# EAGLE board Board_v0 (EAGLE 9.6.2)
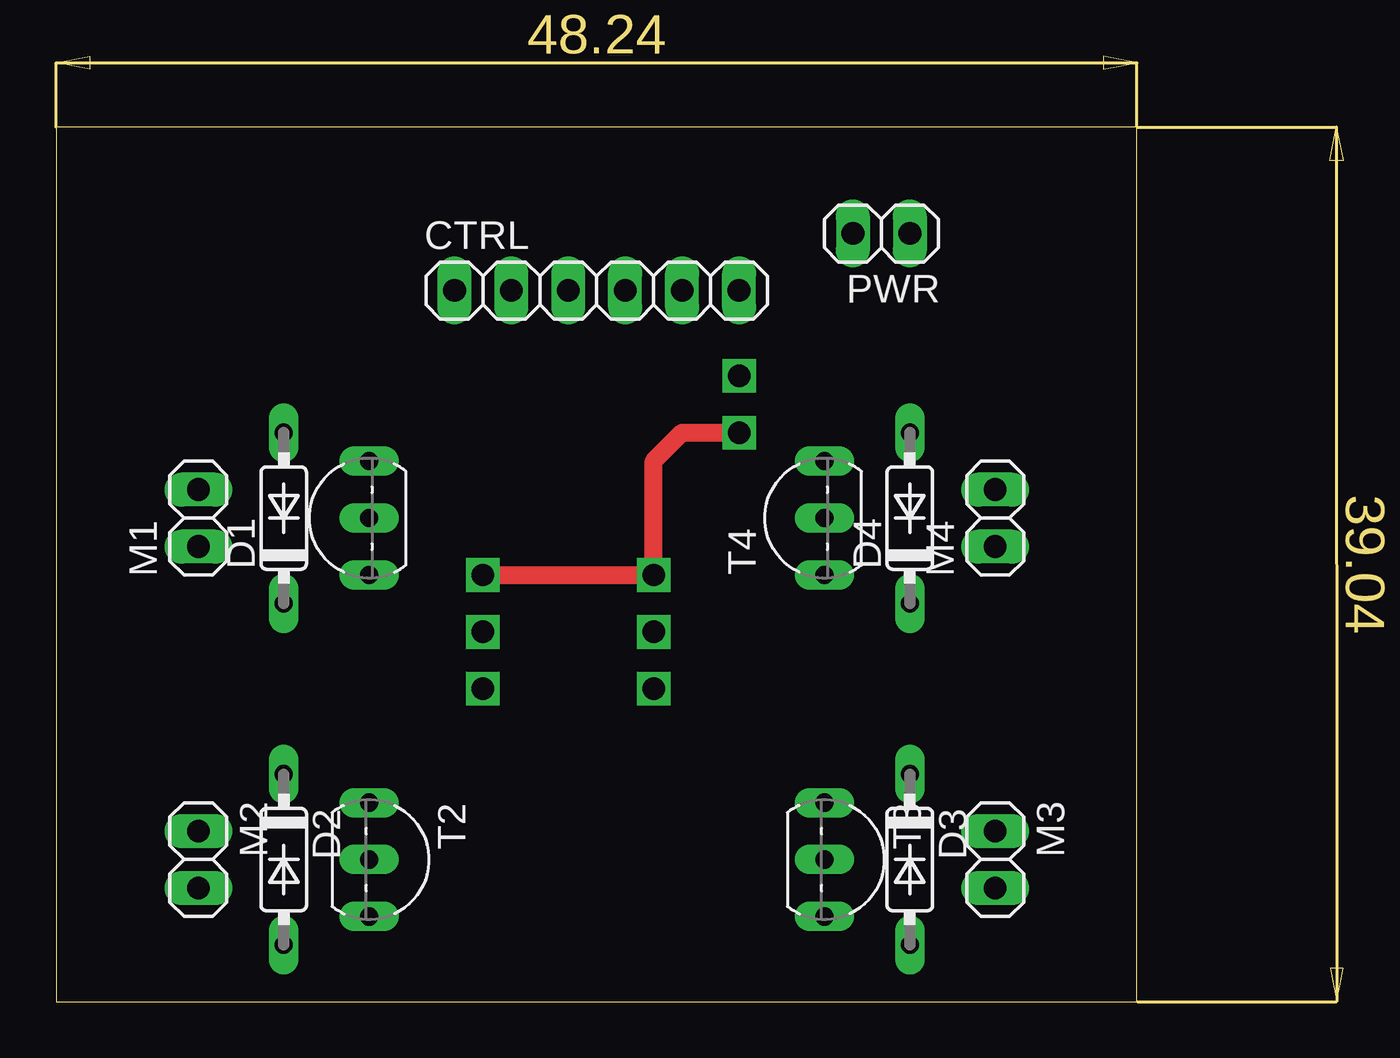
[diagram p0: board, top side]
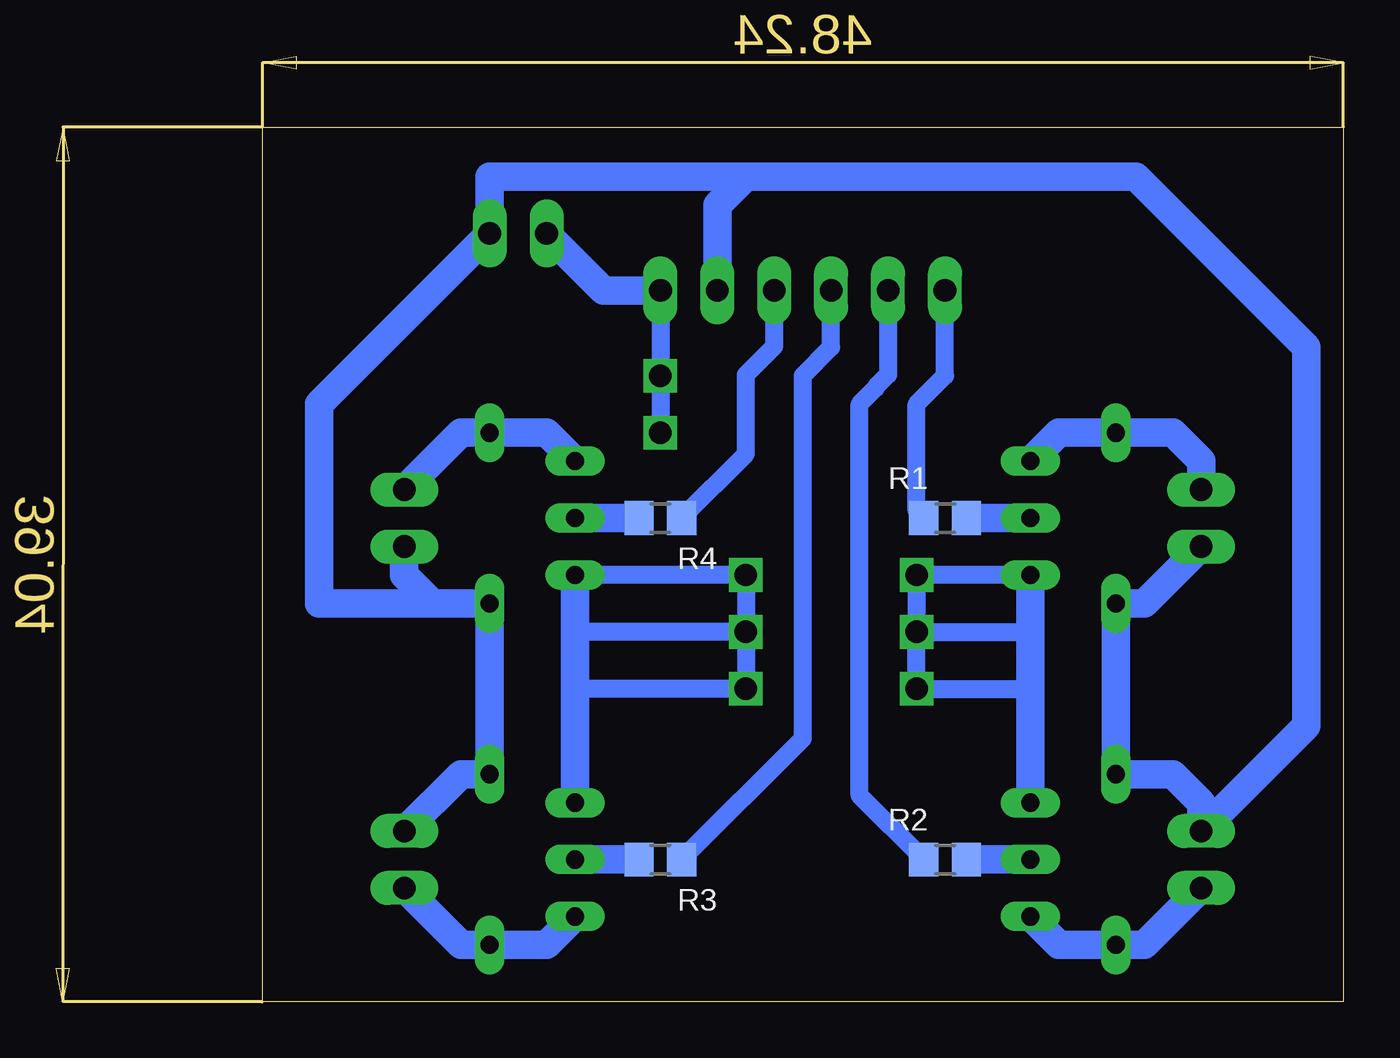
[diagram p1: board, bottom side, seen from below]

Size 48.24 x 39.04 mm. Coordinates in mm from the lower left corner, seen from the top.
Outline: 0,0 48.24,0 48.24,39.04 0,39.04 0,0
Copper layers (1*16): Top 0.035mm / dielectric 1.5mm / Bottom 0.035mm
Design rules "default *": minimum track width 6mil, minimum drill 0.35mm, track to track 40mil, track to pad 6mil, pad to pad 6mil, via to via 6mil, smd to smd 6mil, copper to edge 40mil, drill to drill 6mil, minimum pad ring 10mil, minimum via ring 8mil, stop-mask expansion 4mil, vias tented up to drill 0mil, thermal gap 10mil

## Footprints (pad centres in the part's own frame; a part is rotated, then mirrored left to right if it is on the bottom)
1X06 = drill 1.016 long: 1 -6.35,0; 2 -3.81,0; 3 -1.27,0; 4 1.27,0; 5 3.81,0; 6 6.35,0
DO35-7 = drill 0.813 long: A 3.81,0; C -3.81,0
1X02 = drill 1.016 long: 1 -1.27,0; 2 1.27,0
R0805 = smd 1.3 x 1.5: 1 -0.95,0; 2 0.95,0
TO92-EBC = drill 0.813 long: B 0,-1.27; C 2.54,-1.27; E -2.54,-1.27

## Placement (x,y rotation side)
CTRL  [1X06]  24.13,31.75 0 top
D1  1N4148DO35-7  [DO35-7]  10.16,21.59 90 top
D2  1N4148DO35-7  [DO35-7]  10.16,6.35 270 top
D3  1N4148DO35-7  [DO35-7]  38.1,6.35 270 top
D4  1N4148DO35-7  [DO35-7]  38.1,21.59 90 top
M1  [1X02]  6.35,21.59 90 top
M2  [1X02]  6.35,6.35 270 top
M3  [1X02]  41.91,6.35 270 top
M4  [1X02]  41.91,21.59 90 top
PWR  [1X02]  36.83,34.29 180 top
R1  [R0805]  17.78,21.59 0 bottom
R2  [R0805]  17.78,6.35 0 bottom
R3  [R0805]  30.48,6.35 180 bottom
R4  [R0805]  30.48,21.59 180 bottom
T1  [TO92-EBC]  12.7,21.59 90 top
T2  [TO92-EBC]  15.24,6.35 270 top
T3  [TO92-EBC]  35.56,6.35 270 top
T4  [TO92-EBC]  33.02,21.59 90 top

## Library data of the parts
CTRL M1-M4 PWR = pinhead
D1-D4 = diode
R1-R4 = rcl; SPICEPREFIX: R
T1-T4 = transistor-neu-to92

## Nets
3.3V: CTRL.6 PWR.2 T1.E T2.E T3.E T4.E
B1: R1.2 T1.B
B2: R2.2 T2.B
B3: R3.2 T3.B
B4: R4.2 T4.B
C1: D1.A M1.2 T1.C
C2: D2.A M2.2 T2.C
C3: D3.A M3.2 T3.C
C4: D4.A M4.2 T4.C
N$9: CTRL.1 R1.1
N$10: CTRL.2 R2.1
N$11: CTRL.3 R3.1
N$12: CTRL.4 R4.1
VCC: CTRL.5 D1.C D2.C D3.C D4.C M1.1 M2.1 M3.1 M4.1 PWR.1

## Tracks (layer width: path | path; a pad name or v marks a point on that pad's centre or on a via)
3.3V  (via drill 1)
  Top 0.813: v19.05,19.05 v26.67,19.05 26.67,24.13 27.94,25.4 v30.48,25.4
  Bottom 0.813: CTRL.6 v30.48,27.94 v30.48,25.4 | v26.67,16.51 v26.67,19.05 T4.E | v26.67,16.51 v26.67,13.97 34.29,13.97 | v19.05,16.51 v19.05,19.05 T1.E | v19.05,16.51 v19.05,13.97 13.97,13.97 | v19.05,16.51 13.97,16.51 | v26.67,16.51 34.29,16.51
  Bottom 1.27: T1.E 13.97,16.51 13.97,13.97 T2.E | T4.E 34.29,16.51 34.29,13.97 T3.E | CTRL.6 33.02,31.75 PWR.2
B1
  Bottom 1.27: R1.2 T1.B
B2
  Bottom 1.27: T2.B R2.2
B3
  Bottom 1.27: R3.2 T3.B
B4
  Bottom 1.27: R4.2 T4.B
C1
  Bottom 1.27: T1.C 12.7,25.4 D1.A 7.62,25.4 6.35,24.13 M1.2
C2
  Bottom 1.27: M2.2 8.89,2.54 D2.A 12.7,2.54 T2.C
C3
  Bottom 1.27: T3.C 35.56,2.54 D3.A 39.37,2.54 M3.2
C4
  Bottom 1.27: T4.C 35.56,25.4 D4.A 39.37,25.4 M4.2
N$9
  Bottom 0.813: R1.1 19.05,21.91 19.05,26.67 17.78,27.94 CTRL.1
N$10
  Bottom 0.813: CTRL.2 20.32,27.99 20.88,27.43 20.88,27.38 21.59,26.67 21.59,9.21 R2.1
N$11
  Bottom 0.813: R3.1 24.13,11.75 24.13,27.94 22.86,29.21 CTRL.3
N$12
  Bottom 0.813: R4.1 26.67,24.45 26.67,27.99 25.4,29.26 CTRL.4
VCC
  Bottom 1.27: M1.1 8.89,17.78 D1.C D2.C 7.62,10.16 6.35,8.89 M2.1 1.65,12.32 1.65,29.21 9.27,36.83 26.67,36.83 | D4.C 40.64,17.78 41.91,19.05 M4.1 | CTRL.5 27.94,35.56 26.67,36.83 | 26.67,36.83 38.1,36.83 PWR.1 45.72,26.67 45.72,17.78 D4.C | M3.1 39.37,10.16 D3.C D4.C